# EAGLE board mini_mouse (EAGLE 9.2.0)
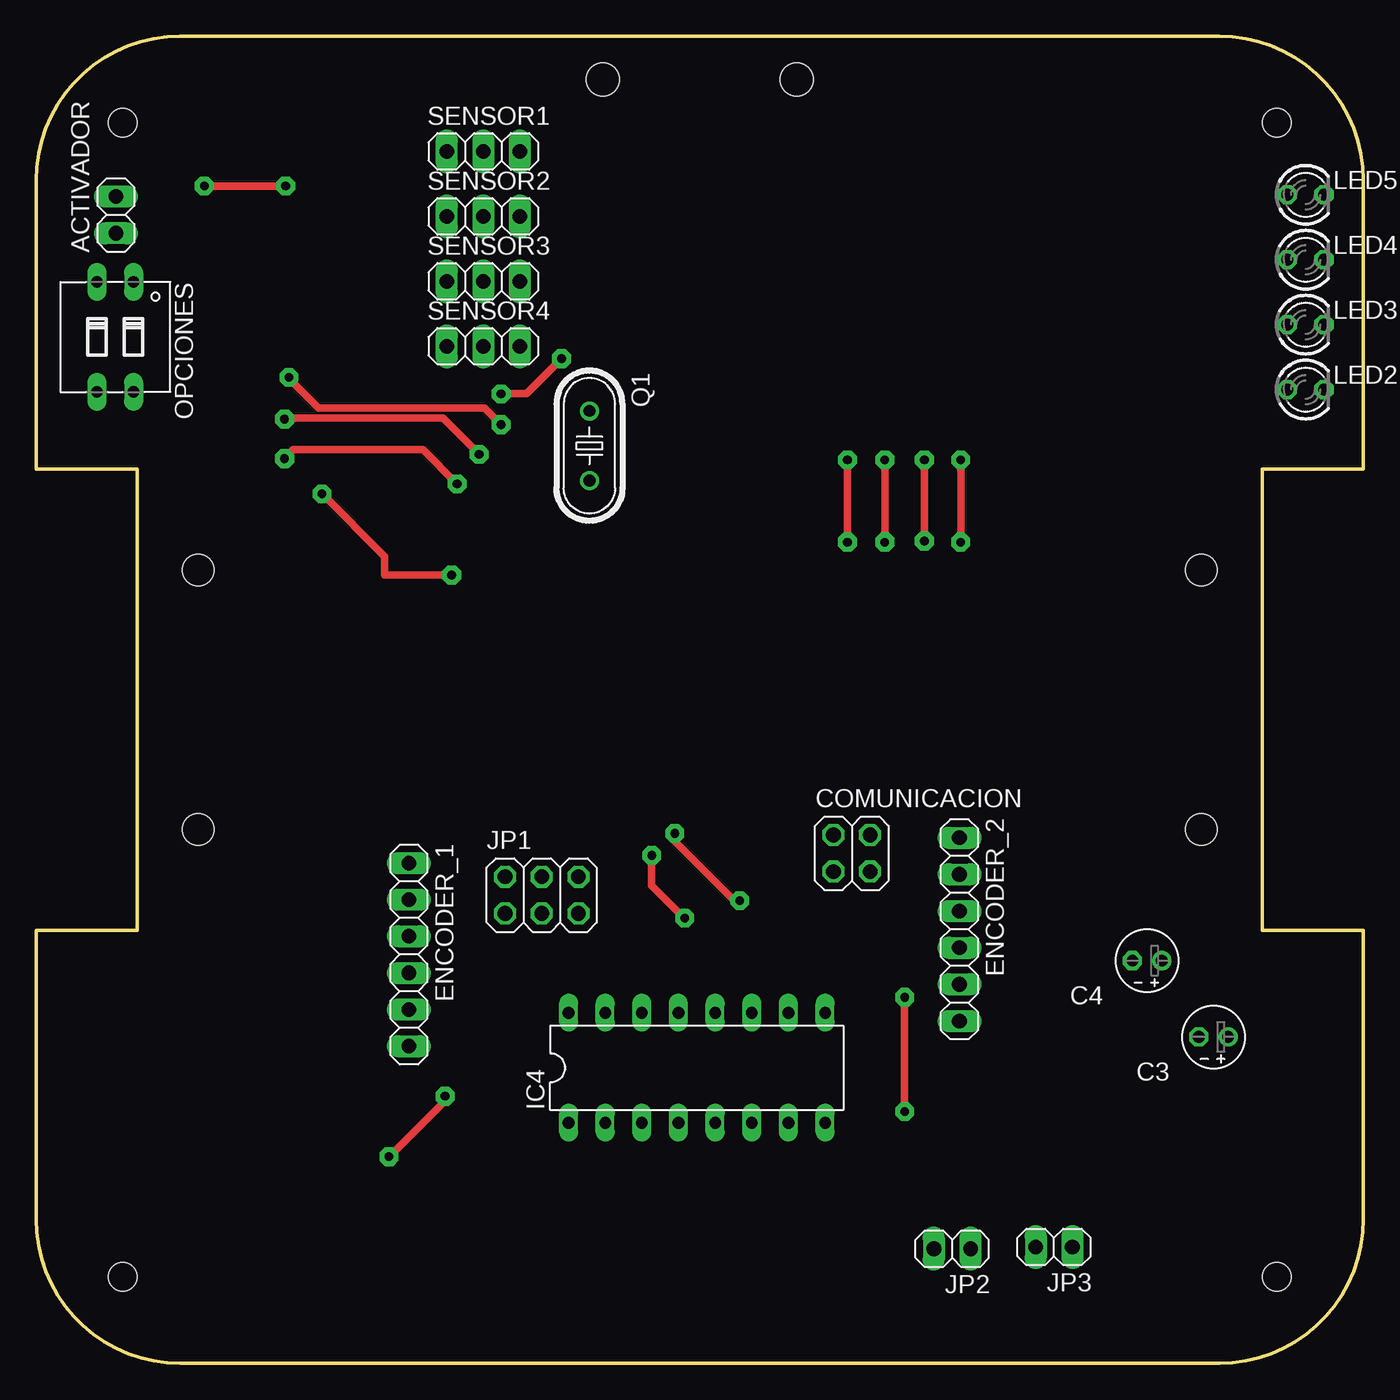
[diagram p0: board, top side]
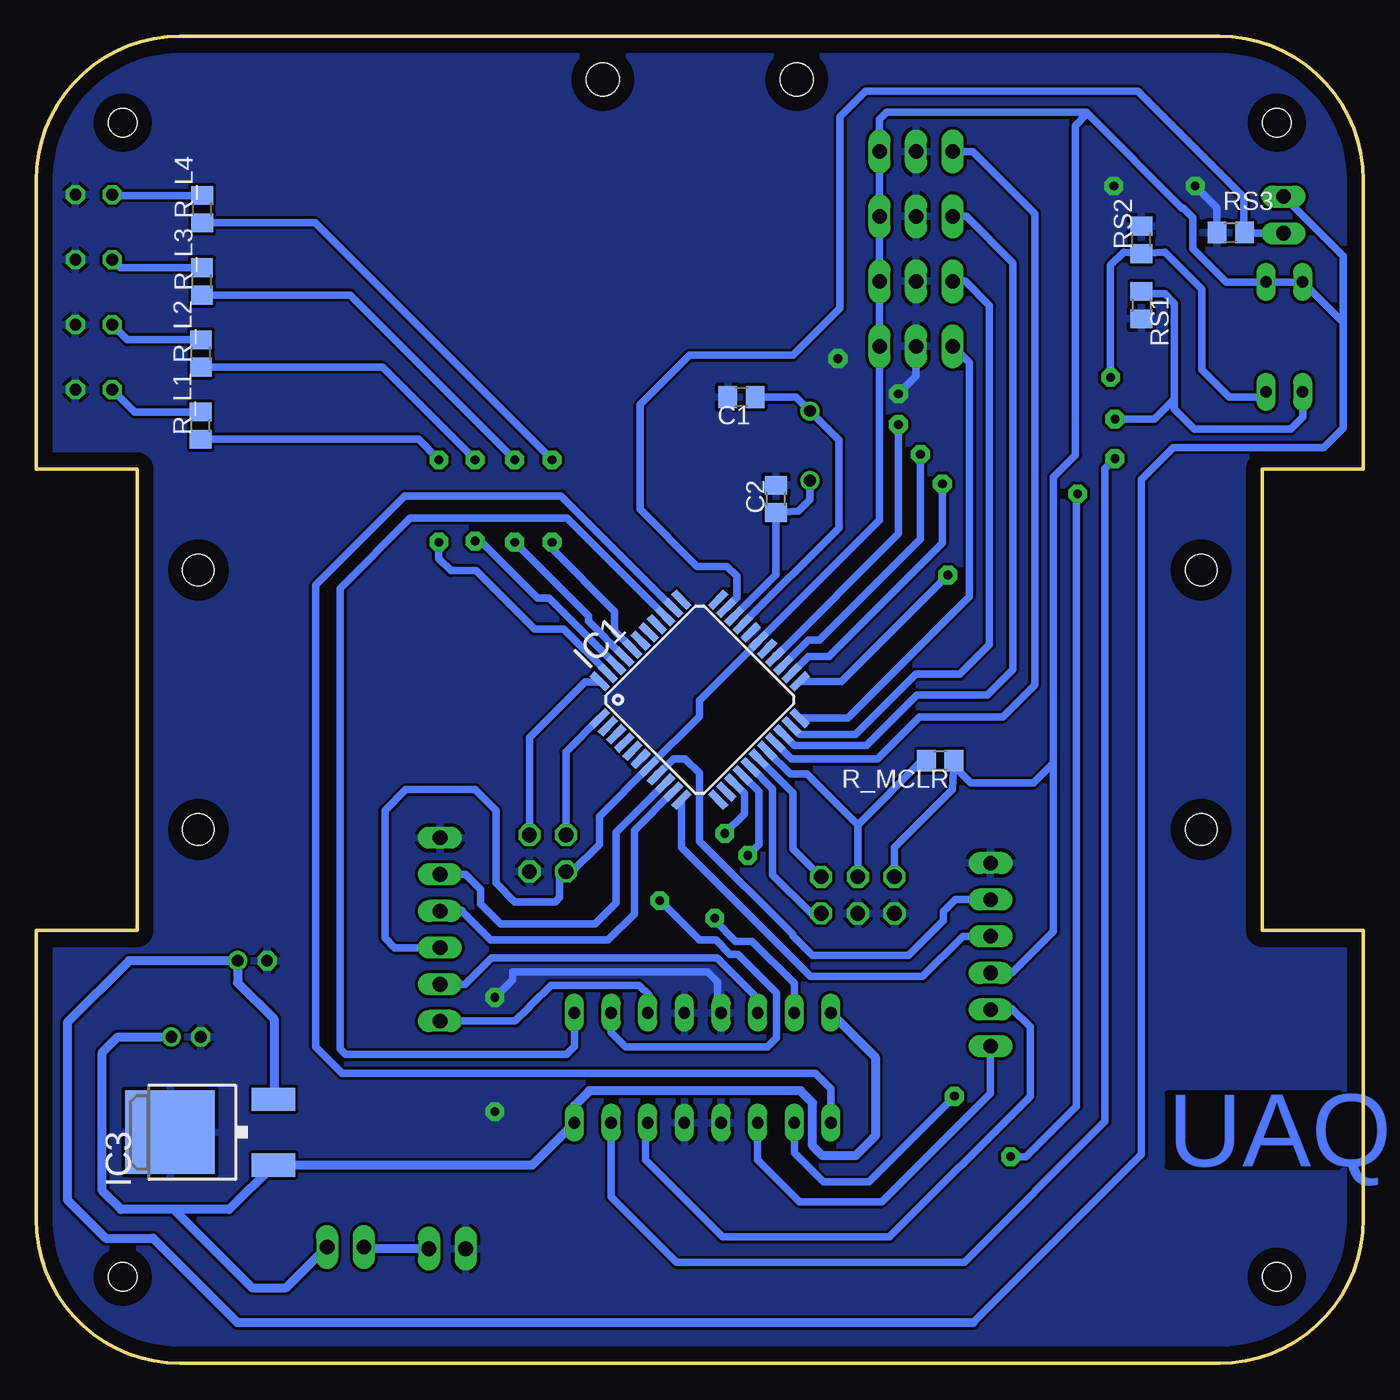
[diagram p1: board, bottom side, seen from below]

Size 92 x 92 mm. Coordinates in mm from the lower left corner, seen from the top.
Outline: 0,30 0,10 arc90 10,0 82,0 arc90 92,10 92,30 85,30 85,62 92,62 92,82 arc90 82,92 10,92 arc90 0,82 0,62 7,62 7,30 0,30
Copper layers (1*16): Top 0.035mm / dielectric 1.5mm / Bottom 0.035mm
Design rules "default": minimum track width 6mil, minimum drill 0.35mm, track to track 6mil, track to pad 6mil, pad to pad 6mil, via to via 6mil, smd to smd 6mil, copper to edge 40mil, drill to drill 6mil, minimum pad ring 10mil, minimum via ring 8mil, stop-mask expansion 4mil, vias tented up to drill 0mil, thermal gap 10mil
Holes 2 mm at 6,86 86,86 6,6 86,6
Holes 2.18 mm at 11.25,55 11.25,37 80.75,55 80.75,37
Holes 2.29 mm at 52.73,89 39.27,89

## Footprints (pad centres in the part's own frame; a part is rotated, then mirrored left to right if it is on the bottom)
1X02 = drill 1.016 long: 1 -1.27,0; 2 1.27,0
R0805 = smd 1.3 x 1.5: 1 -0.95,0; 2 0.95,0
E2-4 = drill 0.813 pad 1.27: + -1.016,0 | drill 0.813 pad 1.27 octagon: - 1.016,0
2X02 = drill 1.016 octagon: 1 -1.27,-1.27; 2 -1.27,1.27; 3 1.27,-1.27; 4 1.27,1.27
1X06 = drill 1.016 long: 1 -6.35,0; 2 -3.81,0; 3 -1.27,0; 4 1.27,0; 5 3.81,0; 6 6.35,0
TQFP44 = smd 1.5 x 0.5: 1 -5.8,4; 2 -5.8,3.2; 3 -5.8,2.4; 4 -5.8,1.6; 5 -5.8,0.8; 6 -5.8,0; 7 -5.8,-0.8; 8 -5.8,-1.6; 9 -5.8,-2.4; 10 -5.8,-3.2; 11 -5.8,-4; 23 5.8,-4; 24 5.8,-3.2; 25 5.8,-2.4; 26 5.8,-1.6; 27 5.8,-0.8; 28 5.8,0; 29 5.8,0.8; 30 5.8,1.6; 31 5.8,2.4; 32 5.8,3.2; 33 5.8,4 | smd 0.5 x 1.5: 12 -4,-5.8; 13 -3.2,-5.8; 14 -2.4,-5.8; 15 -1.6,-5.8; 16 -0.8,-5.8; 17 0,-5.8; 18 0.8,-5.8; 19 1.6,-5.8; 20 2.4,-5.8; 21 3.2,-5.8; 22 4,-5.8; 34 4,5.8; 35 3.2,5.8; 36 2.4,5.8; 37 1.6,5.8; 38 0.8,5.8; 39 0,5.8; 40 -0.8,5.8; 41 -1.6,5.8; 42 -2.4,5.8; 43 -3.2,5.8; 44 -4,5.8
DPACK = smd 1.6 x 3: 1 -2.28,-4.8; 3 2.28,-4.8 | smd 5.8 x 6.2: 4 0,2.38
DIL16 = drill 0.813 long: 1 -8.89,-3.81; 2 -6.35,-3.81; 3 -3.81,-3.81; 4 -1.27,-3.81; 5 1.27,-3.81; 6 3.81,-3.81; 7 6.35,-3.81; 8 8.89,-3.81; 9 8.89,3.81; 10 6.35,3.81; 11 3.81,3.81; 12 1.27,3.81; 13 -1.27,3.81; 14 -3.81,3.81; 15 -6.35,3.81; 16 -8.89,3.81
2X03 = drill 1.016 octagon: 1 -2.54,-1.27; 2 -2.54,1.27; 3 0,-1.27; 4 0,1.27; 5 2.54,-1.27; 6 2.54,1.27
LED3MM = drill 0.813 octagon: A -1.27,0; K 1.27,0
DIP02YL = drill 0.813 long: 1 -1.27,-3.81; 2 1.27,-3.81; 3 1.27,3.81; 4 -1.27,3.81
HC49U-V = drill 0.813: 1 -2.413,0; 2 2.413,0
1X03 = drill 1.016 long: 1 -2.54,0; 2 0,0; 3 2.54,0

## Placement (x,y rotation side)
ACTIVADOR  [1X02]  5.54,79.6 90 top
C1  [R0805]  43.1,66.98 180 bottom
C2  [R0805]  40.72,59.92 90 bottom
C3  [E2-4]  81.61,22.63 180 top
C4  [E2-4]  77.01,27.91 180 top
COMUNICACION  [2X02]  56.54,35.36 0 top
ENCODER_1  [1X06]  25.85,28.33 270 top
ENCODER_2  [1X06]  64,30.09 270 top
IC1  PIC18F4550_TQFP  [TQFP44]  46,46 45 bottom
IC3  LP2950CDT-5.0  [DPACK]  80.34,16.03 90 bottom
IC4  L293D  [DIL16]  45.8,20.49 0 top
JP1  [2X03]  35.05,32.46 0 top
JP2  [1X02]  63.5,7.95 180 top
JP3  [1X02]  70.56,8.08 180 top
LED2  [LED3MM]  88,67.5 0 top
LED3  [LED3MM]  88,72 0 top
LED4  [LED3MM]  88,76.5 0 top
LED5  [LED3MM]  88,81 0 top
OPCIONES  [DIP02YL]  5.49,71.15 180 top
Q1  [HC49U-V]  38.35,63.6 270 top
R_L1  [R0805]  80.59,65 90 bottom
R_L2  [R0805]  80.57,70 90 bottom
R_L3  [R0805]  80.51,75 90 bottom
R_L4  [R0805]  80.49,80 90 bottom
R_MCLR  [R0805]  29.34,41.78 180 bottom
RS1  [R0805]  15.39,73.36 270 bottom
RS2  [R0805]  15.39,77.88 90 bottom
RS3  [R0805]  9.2,78.38 0 bottom
SENSOR1  [1X03]  31,84 0 top
SENSOR2  [1X03]  31,79.5 0 top
SENSOR3  [1X03]  31,75 0 top
SENSOR4  [1X03]  31,70.5 0 top

## Library data of the parts
ACTIVADOR COMUNICACION ENCODER_1 ENCODER_2 JP1-JP3 SENSOR1-SENSOR4 = pinhead
C1 C2 R_L1-R_L4 R_MCLR RS1-RS3 = rcl; SPICEPREFIX: R
C3 C4 = rcl; SPICEPREFIX: C
IC1 = microchip; MF: MICROCHIP; MPN: PIC18F4550-I/PT; OC_FARNELL: 9321365; OC_NEWARK: 08J9633
IC3 = v-reg
IC4 = st-microelectronics; MPN: L293D; OC_FARNELL: 9589619; OC_NEWARK: 56P8249
LED2-LED5 = led
OPCIONES = switch-dil; OC_FARNELL: unknown; OC_NEWARK: unknown
Q1 = crystal; OC_FARNELL: 1666969; OC_NEWARK: unknown

## Nets
+5V: ACTIVADOR.2 C4.+ COMUNICACION.1 ENCODER_1.4 ENCODER_2.4 IC1.7 IC1.28 IC3.3 JP1.2 OPCIONES.1 OPCIONES.2 R_MCLR.1 SENSOR1.3 SENSOR2.3 SENSOR3.3 SENSOR4.3
BAT: C3.+ IC3.1 IC4.8 IC4.16 JP3.1
D1_M1: IC1.23 IC4.2
D1_M2: IC1.15 IC4.15
D2_M1: IC1.24 IC4.7
D2_M2: IC1.14 IC4.10
GND: C1.2 C2.2 C3.- C4.- COMUNICACION.3 ENCODER_1.1 ENCODER_2.1 IC1.6 IC1.29 IC3.4 IC4.4 IC4.5 IC4.12 IC4.13 JP1.1 JP1.3 JP2.2 LED2.K LED3.K LED4.K LED5.K RS1.2 RS2.2 RS3.1 SENSOR1.2 SENSOR2.2 SENSOR3.2 SENSOR4.2
LED_1: IC1.43 R_L1.1
LED_2: IC1.42 R_L2.1
LED_3: IC1.41 R_L3.1
LED_4: IC1.40 R_L4.1
M1_1: ENCODER_1.6 IC4.3
M1_2: ENCODER_2.6 IC4.11
M2_1: ENCODER_1.5 IC4.6
M2_2: ENCODER_2.5 IC4.14
MCLR: IC1.18 JP1.4 R_MCLR.2
N$1: LED2.A R_L1.2
N$2: LED3.A R_L2.2
N$3: LED4.A R_L3.2
N$4: LED5.A R_L4.2
N$5: JP2.1 JP3.2
OSC1: C1.1 IC1.30 Q1.1
OSC2: C2.1 IC1.31 Q1.2
OUT_A1: ENCODER_1.2 IC1.8
OUT_A2: ENCODER_2.2 IC1.9
OUT_B1: ENCODER_1.3 IC1.11
OUT_B2: ENCODER_2.3 IC1.10
PA_1: IC1.25 OPCIONES.3 RS1.1
PA_2: IC1.26 OPCIONES.4 RS2.1
PGC: IC1.16 JP1.5
PGD: IC1.17 JP1.6
PWM_1: IC1.35 IC4.1
PWM_2: IC1.36 IC4.9
RX: COMUNICACION.2 IC1.1
S1: IC1.19 SENSOR1.1
S2: IC1.20 SENSOR2.1
S3: IC1.21 SENSOR3.1
S4: IC1.22 SENSOR4.1
START: ACTIVADOR.1 IC1.32 RS3.2
TX: COMUNICACION.4 IC1.44

## Tracks (layer width: path | path; a pad name or v marks a point on that pad's centre or on a via)
+5V
  Bottom 0.508: IC3.3 75.51,18.31 74.38,18.31 | 21.49,41.6 22.86,40.23 27.2,40.23 28.49,41.52 R_MCLR.1 28.49,39.79 32.51,35.76 JP1.2 | 27.05,2.82 15.39,14.48 15.39,61.27 13.18,63.48 2.74,63.48 1.4,64.82 1.4,72.14 | ENCODER_2.4 67.14,28.82 67.82,29.49 67.82,38.33 66.37,39.78 61.57,39.78 60.12,38.33 60.12,33.3 58.83,32 56.01,32 55.7,32.31 55.7,33.66 COMUNICACION.1 54.84,34.09 52.96,35.97 52.96,37.91 IC1.7 46.02,44.84 46.02,45.95 41.9,50.08 IC1.28 33.54,58.46 SENSOR4.3 SENSOR3.3 SENSOR2.3 SENSOR1.3 33.54,86.25 33.07,86.72 19.2,86.72 19.13,86.64 | ENCODER_1.4 24.37,27.06 21.49,29.95 21.49,41.6 | 19.13,86.64 12.57,80.09 12.5,80.09 11.81,79.4 11.81,77.27 9.5,74.95 OPCIONES.1 OPCIONES.2 1.4,72.14 | 21.49,41.6 21.49,61.42 19.96,62.94 19.96,85.8 19.13,86.64 | ACTIVADOR.2 1.4,76.73 1.4,72.14
  Bottom 0.61: 27.05,2.82 78.03,2.82 83.9,8.69 87.17,8.69 89.84,11.35 89.84,23.62 85.55,27.91 C4.+ 78.03,26.39 75.51,23.88 75.51,18.31
BAT
  Bottom 0.61: IC4.16 33.83,21.23 33.83,15.77 35.2,14.4 37.49,14.4 38.18,15.09 38.18,18.06 39.01,18.9 53.65,18.9 54.69,17.86 IC4.8 57.62,13.75 IC3.1 | IC3.1 75.54,13.29 | C3.+ 86.33,22.63 87.4,21.57 87.4,11.96 86.11,10.67 82.45,10.67 | 82.45,10.67 77.04,5.26 74.65,5.26 JP3.1 | IC3.1 78.62,10.67 82.45,10.67
D1_M1  (via drill 0.6 pad 1.3)
  Top 0.508: v24.46,14.33 28.35,18.21 v28.35,18.52 | v28.8,54.64 24.15,54.64 24.15,55.94 v19.81,60.27
  Bottom 0.508: IC4.2 39.45,14.61 37.41,12.57 34.29,12.57 v28.35,18.52 | v24.46,14.33 23.39,14.33 19.89,17.83 19.89,60.2 v19.81,60.27 | IC1.23 36.17,47.27 v28.8,54.64
D1_M2  (via drill 0.6 pad 1.3)
  Top 0.508: v44.96,30.86 42.67,33.15 v42.67,35.2
  Bottom 0.508: IC4.15 39.45,26.34 42.37,29.26 43.51,29.26 44.96,30.71 v44.96,30.86 | IC1.15 41.91,39.65 41.91,35.97 v42.67,35.2
D2_M1  (via drill 0.6 pad 1.3)
  Top 0.508: v29.18,60.96 26.82,63.32 17.83,63.32 v17.22,62.71
  Bottom 0.508: IC4.7 52.15,11.53 47.62,7.01 27.66,7.01 17.91,16.76 17.91,62.03 v17.22,62.71 | v29.18,60.96 29.18,56.84 37.03,49 38.48,49 IC1.24
D2_M2  (via drill 0.6 pad 1.3)
  Top 0.508: v48.77,32.08 48.39,32.08 44.27,36.2 v44.27,36.73
  Bottom 0.508: IC4.10 52.15,22.96 51.13,21.95 41.3,21.95 40.69,22.55 40.69,25.68 43.36,28.35 43.89,28.35 44.88,29.34 46.02,29.34 v48.77,32.08 | IC1.14 42.9,39.51 42.9,38.1 v44.27,36.73
GND  (via drill 0.6 pad 1.3)
  Top 0.508: v32.23,67.21 33.98,67.21 v36.42,69.65 | v11.66,81.61 v17.3,81.61 | v60.2,25.38 v60.2,17.45
  Bottom 0.508: SENSOR4.2 31,68.44 v32.23,67.21 | RS3.1 10.14,80.1 v11.66,81.61 | IC4.13 44.76,24.53 44.76,26.43 45.45,27.13 58.98,27.13 58.98,26.59 v60.2,25.38
  pour Bottom (isolate 0.2): 0.23,-0.38 92.58,-0.38 92.58,93.57 0.23,93.57
LED_1  (via drill 0.6 pad 1.3)
  Top 0.508: v64.08,56.92 v64.08,62.64
  Bottom 0.508: IC1.43 55.43,50.9 57.45,50.9 61.49,54.94 63.25,54.94 64.08,55.78 v64.08,56.92 | v64.08,62.64 65.5,64.05 R_L1.1
LED_2  (via drill 0.6 pad 1.3)
  Top 0.508: v61.57,57 v61.57,62.64
  Bottom 0.508: IC1.42 56.43,53.03 57.23,53.03 61.19,57 v61.57,57 | v61.57,62.64 67.98,69.05 R_L2.1
LED_3  (via drill 0.6 pad 1.3)
  Top 0.508: v58.83,56.92 v58.83,62.64
  Bottom 0.508: IC1.41 53.72,51.46 53.72,51.82 v58.83,56.92 | v58.83,62.64 70.24,74.05 R_L3.1
LED_4  (via drill 0.6 pad 1.3)
  Top 0.508: v56.24,56.92 v56.24,62.64
  Bottom 0.508: IC1.40 51.89,50.76 51.89,52.12 56.24,56.46 v56.24,56.92 | v56.24,62.64 72.65,79.05 R_L4.1
M1_1
  Bottom 0.508: IC4.3 41.99,14.1 39.09,11.2 33.38,11.2 25.85,18.73 ENCODER_1.6
M1_2
  Bottom 0.508: IC4.11 49.61,25.45 49.53,25.53 50.22,26.21 56.31,26.21 57.65,24.88 57.88,24.65 58.79,23.74 ENCODER_2.6
M2_1
  Bottom 0.508: IC4.6 49.76,16.53 49.76,14.1 44.42,8.76 32.84,8.76 23.09,18.52 23.09,23.32 24.38,24.61 24.47,24.52 ENCODER_1.5
M2_2
  Bottom 0.508: IC4.14 41.99,25.3 44.81,28.12 60.43,28.12 62.27,26.28 ENCODER_2.5
MCLR
  Bottom 0.508: IC1.18 39.71,40.84 38.56,40.84 35.05,37.34 | 35.05,37.34 JP1.4 | 35.05,37.34 30.61,41.78 R_MCLR.2
N$1
  Bottom 0.508: R_L1.2 85.18,65.95 LED2.A
N$2
  Bottom 0.508: R_L2.2 85.68,70.95 LED3.A
N$3
  Bottom 0.508: R_L3.2 86.18,75.95 LED4.A
N$4
  Bottom 0.508: R_L4.2 86.68,80.95 LED5.A
N$5
  Bottom 0.61: JP2.1 69.16,7.95 JP3.2
OSC1
  Bottom 0.508: IC1.30 36.35,57.91 36.35,64.01 Q1.1 39.32,66.98 C1.1
OSC2
  Bottom 0.508: IC1.31 40.72,54.68 C2.1 39.15,59.07 38.35,59.87 Q1.2
OUT_A1
  Bottom 0.508: 48.97,40.84 IC1.8 47.83,41.91 47.02,41.91 46.02,40.92 46.02,36.2 39.55,29.72 39.55,29.64 38.18,28.27 31.55,28.27 29.11,30.71 29.11,31.32 28.28,32.14 ENCODER_1.2
OUT_A2
  Bottom 0.508: IC1.9 51.82,36.79 51.82,31.93 53.26,30.48 59.82,30.48 61.19,31.85 61.19,32.84 62.24,33.9 ENCODER_2.2
OUT_B1
  Bottom 0.508: IC1.11 47.27,35.77 38.33,26.82 30.56,26.82 27.78,29.6 ENCODER_1.3
OUT_B2
  Bottom 0.508: IC1.10 50.52,36.95 50.52,31.17 52.35,29.34 60.5,29.34 62.48,31.32 62.48,31.39 63.96,31.39 ENCODER_2.3
PA_1  (via drill 0.6 pad 1.3)
  Top 0.508: v30.71,63.02 28.19,65.53 17.3,65.53 v17.22,65.46
  Bottom 0.508: 13.11,66.83 13.11,73.46 13.78,74.13 15.22,74.13 RS1.1 | 13.11,66.83 13.11,66.14 11.73,64.77 5.03,64.77 4.22,65.58 OPCIONES.3 | IC1.25 38.47,50.14 37.72,50.14 30.71,57.15 v30.71,63.02 | v17.22,65.46 14.48,65.46 13.11,66.83
PA_2  (via drill 0.6 pad 1.3)
  Top 0.508: v32.23,65.08 31.09,66.22 19.58,66.22 17.53,68.28 v17.53,68.35
  Bottom 0.508: 40.77,49.07 IC1.26 32.23,57.51 v32.23,65.08 | v17.53,68.35 17.53,76.11 16.61,77.03 RS2.1 13.78,77.03 11.2,74.45 11.2,68.89 9.3,66.98 7.11,66.98 OPCIONES.4
PGC
  Bottom 0.508: IC1.16 40.95,39.83 40.95,33.86 38.27,31.19 JP1.5
PGD
  Bottom 0.508: IC1.17 39.52,39.52 39.52,36.73 39.52,36.27 39.52,35.66 JP1.6
PWM_1
  Bottom 0.508: IC1.35 55.6,60.12 66.45,60.12 72.62,53.95 72.62,21.95 70.79,20.12 37.98,20.12 36.91,19.04 IC4.1
PWM_2
  Bottom 0.508: IC1.36 55.2,58.6 66.06,58.6 70.94,53.72 70.94,21.79 70.56,21.41 55.24,21.41 54.69,21.97 IC4.9
RX
  Bottom 0.508: IC1.1 55.27,42.39 COMUNICACION.2
S1
  Bottom 0.508: IC1.19 39.65,41.91 33.68,41.91 30.79,44.81 24.99,44.81 23.39,46.41 23.16,46.63 22.78,47.02 22.78,79.7 27.08,84 SENSOR1.1
S2
  Bottom 0.508: IC1.20 39.43,42.82 34.44,42.82 30.94,46.33 26.06,46.33 24.99,47.4 24.69,47.7 24.31,48.08 24.31,76.28 27.53,79.5 SENSOR2.1
S3
  Bottom 0.508: IC1.21 39.06,43.59 35.2,43.59 31.01,47.78 27.96,47.78 25.91,49.84 25.91,73.3 27.6,75 SENSOR3.1
S4
  Bottom 0.508: IC1.22 35.74,44.73 27.32,53.15 27.32,69.36 SENSOR4.1
START
  Bottom 0.508: IC1.32 43.43,53.09 43.43,54.56 44.12,55.24 46.18,55.24 50.14,59.21 50.14,66.45 46.71,69.88 39.55,69.88 37.76,71.67 37.41,72.01 36.27,73.15 36.27,86.41 34.52,88.16 15.62,88.16 8.31,80.85 8.31,78.42 RS3.2 8.29,78.33 ACTIVADOR.1
TX
  Bottom 0.508: IC1.44 52.96,47.24 53.95,47.24 57.81,43.38 COMUNICACION.4

## Text on the board
Bottom: UAQ